# EAGLE board EagleTemplate-new (EAGLE 7.7.0)

Size 100.01 x 100 mm. Coordinates in mm from the lower left corner, seen from the top.
Copper layers (1*16): Top 0.035mm / dielectric 1.5mm / Bottom 0.035mm
Design rules "default *": minimum track width 5mil, minimum drill 0.2mm, track to track 5mil, track to pad 5mil, pad to pad 5mil, via to via 5mil, smd to smd 5mil, copper to edge 0.4mm, drill to drill 5mil, minimum pad ring 3mil, minimum via ring 3mil, stop-mask expansion 4mil, vias tented up to drill 0mil, thermal gap 10mil

## Footprints (pad centres in the part's own frame; a part is rotated, then mirrored left to right if it is on the bottom)
BOARD-DINRAIL-3.17INX10CM = hole 4: 94.742,15.24; 5.08,85.344; 94.742,85.344; 5.08,15.24 | hole 3.1: 5.08,96.52; 95.25,96.52; 5.08,3.81; 93.98,3.81
FIDUCIAL_1MM = smd 1 x 1: 1 0,0

## Placement (x,y rotation side)
BOARD1  BOARD80X100  [BOARD-DINRAIL-3.17INX10CM]  0.01,0 0 top
FID1  FIDUCIAL  [FIDUCIAL_1MM]  88.91,93.98 0 top
FID2  FIDUCIAL  [FIDUCIAL_1MM]  12.71,5.08 0 top
OSHW1  DOC-OSHW-LOGO-M  [OSHW-LOGO-M]  12.71,95.25 0 top

## Library data of the parts
BOARD1 FID1 FID2 OSHW1 = SPCoast

## Text on the board
tPlace: 2019-11 | v#.# | v#.# | 2019-11
Document: Use tPlace/bPlace for silkscreen text and drawings / Use Document, tDocu and bDocu for assembly notes and documentation that does NOT go on the board